# Altium PCB PoHalf.PcbDoc (part 1 of 2)
Units mil, origin at the board's own origin, x right, y up, seen from the top; angles counter-clockwise.
Board outline 6500 x 4500 mil, 2 copper layers (Top Layer, Bottom Layer), stack 33.512 mil thick; 134 components, 97 nets, 504 pads, 130 vias.
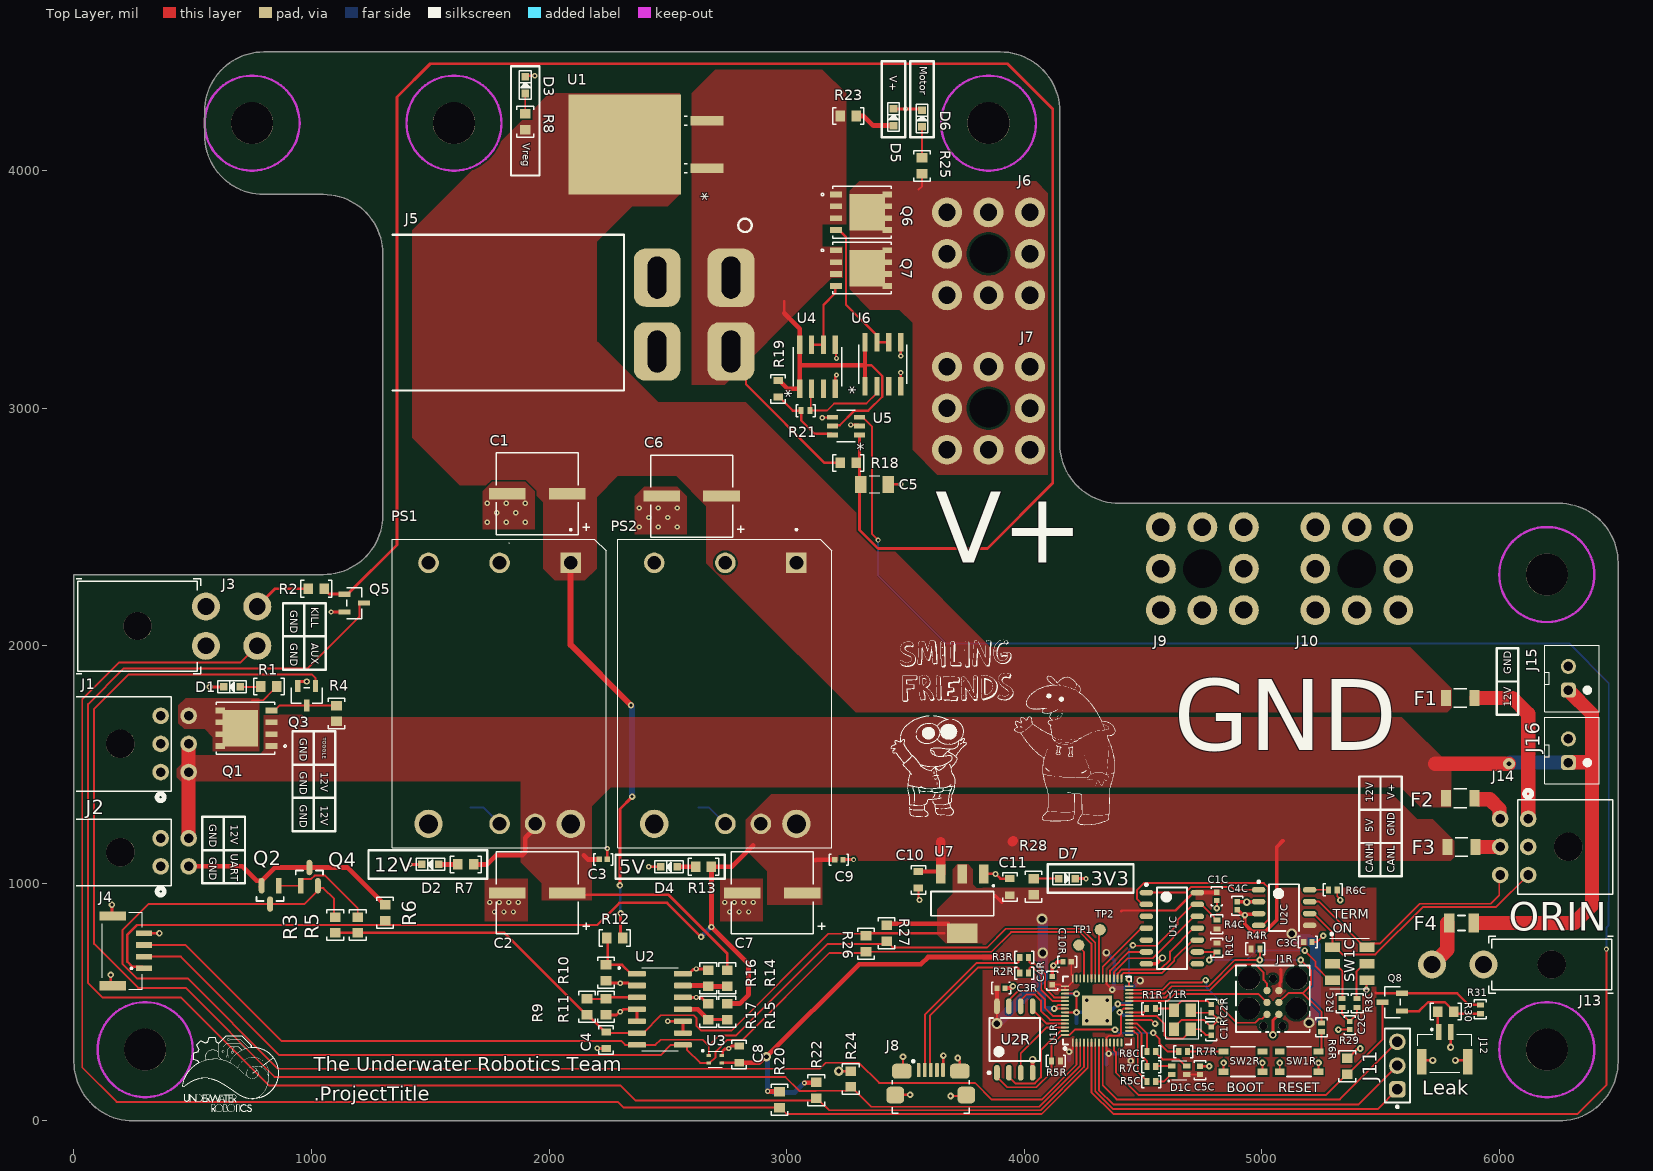
[diagram p0: Top Layer view]
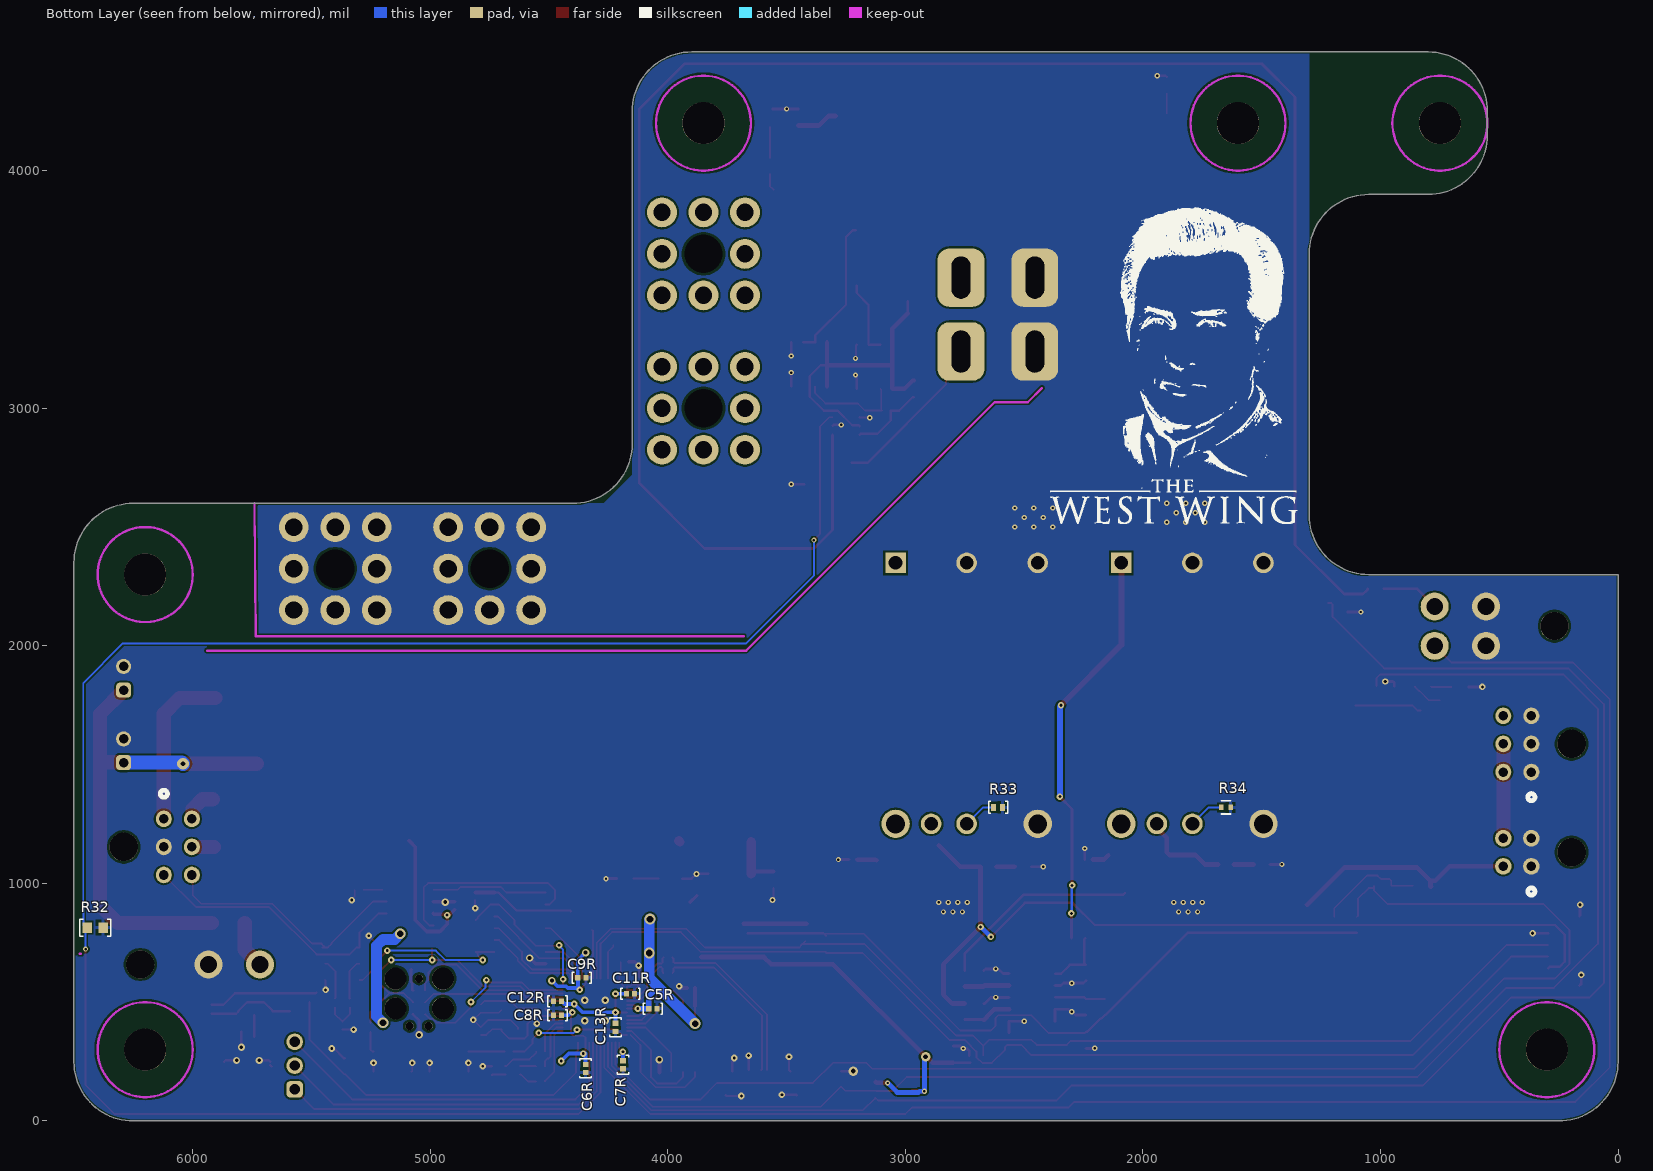
[diagram p1: Bottom Layer view, seen from below]
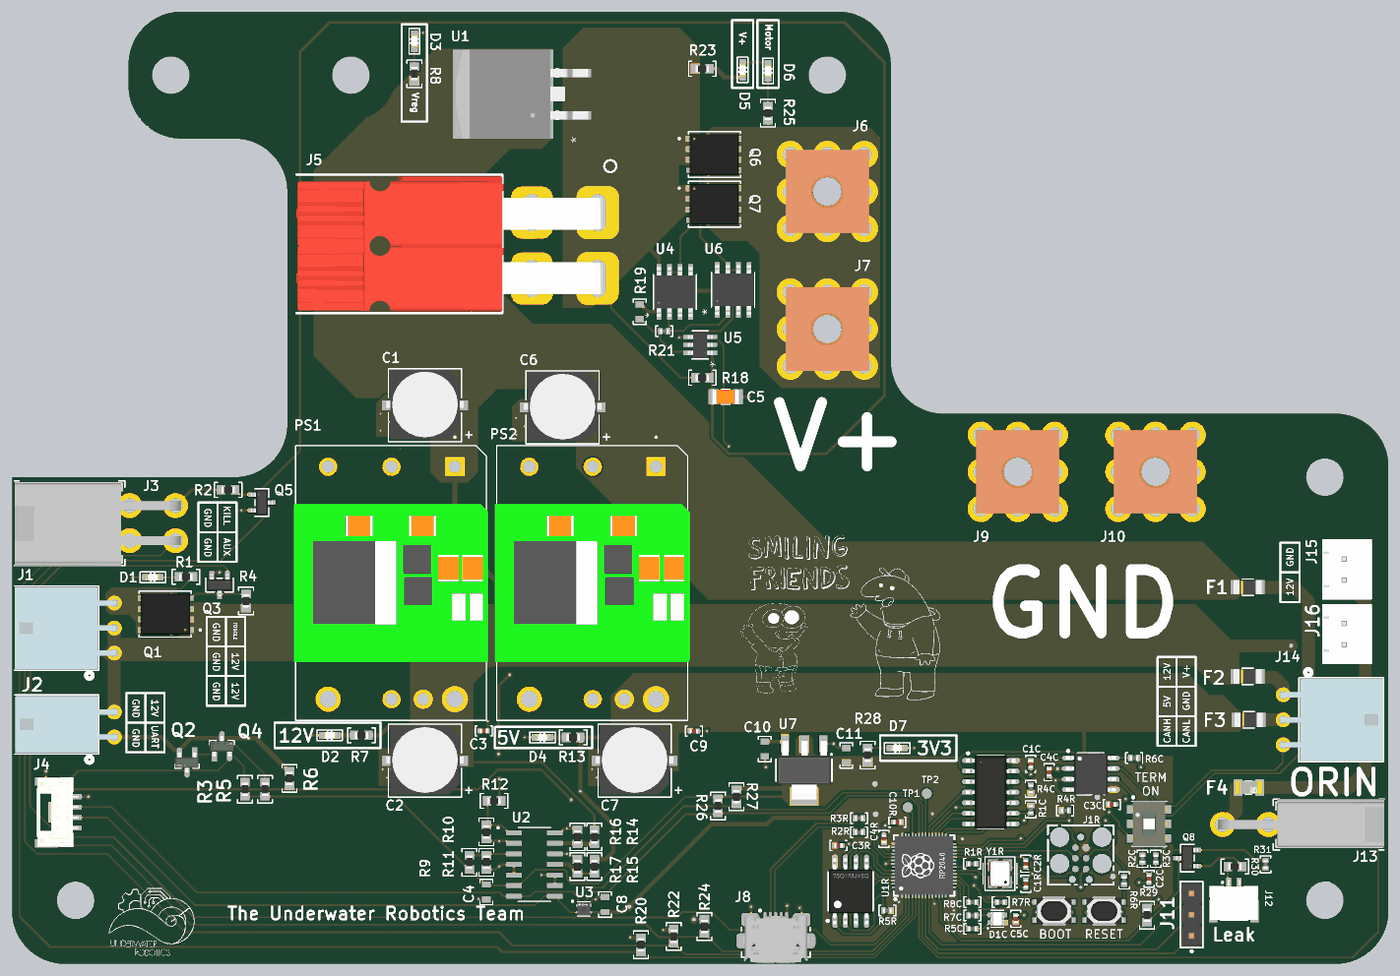
[diagram p3: 3D render of the assembled board from above, using the file's embedded part models]
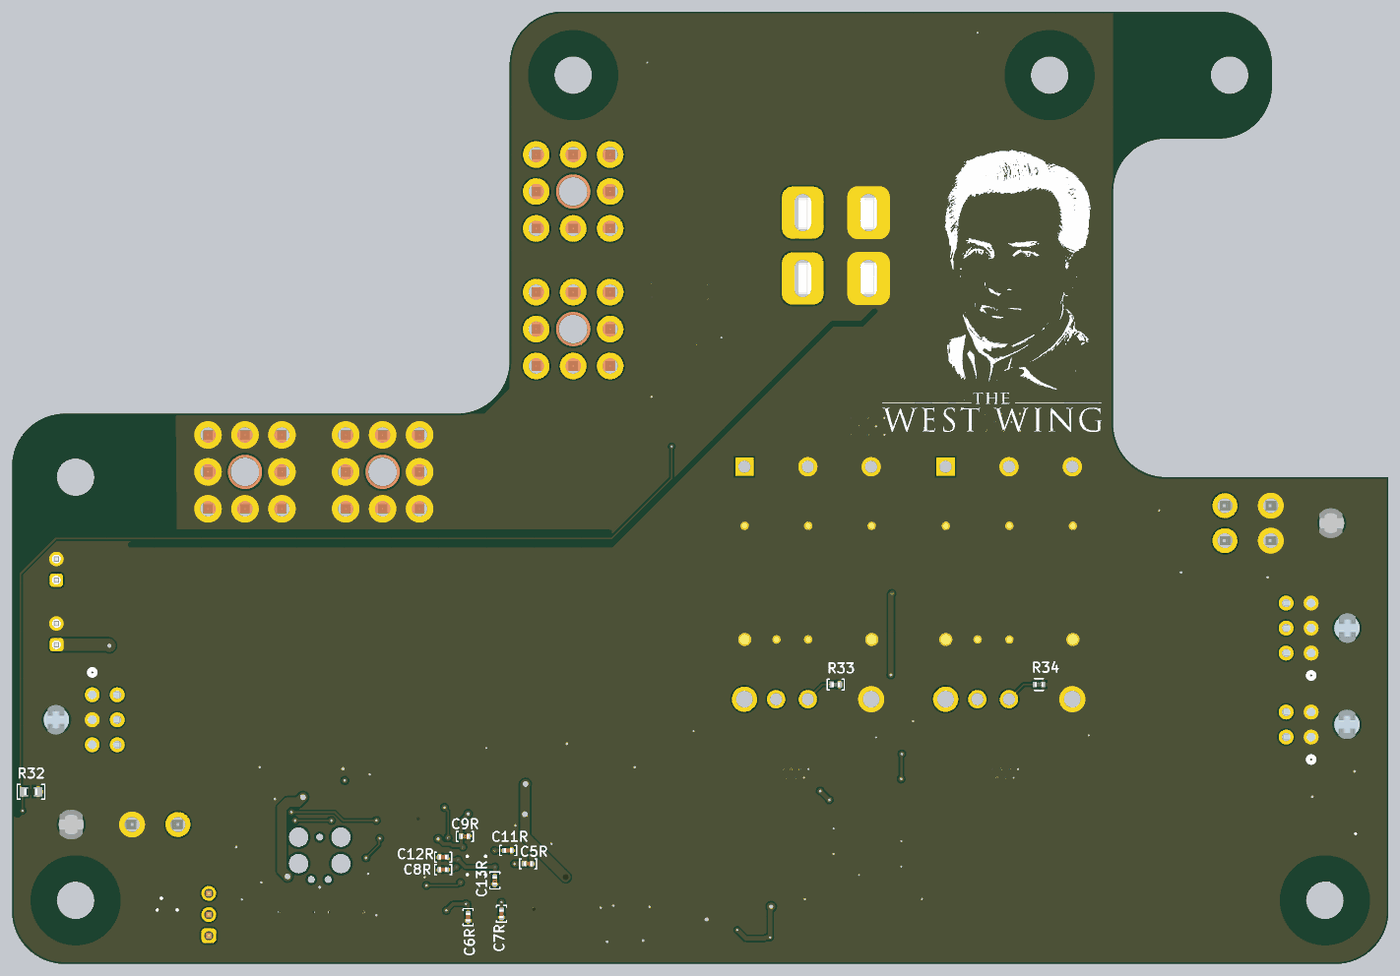
[diagram p4: 3D render of the assembled board from below, using the file's embedded part models]

## Layer stack, top to bottom
Top Solder: solder mask 1, SM-001, Dk 4
Top Layer: signal copper 2.7559
Dielectric 3: core 28, Core-039, Dk 4.8
Bottom Layer: signal copper 2.7559
Bottom Solder: solder mask 1, SM-001, Dk 4

## Board outline
800,3900 cw(c800,4150) 550,4150 550,4250 cw(c800,4250) 800,4500 3900,4500 cw(c3900,4250) 4150,4250 4150,2850 ccw(c4400,2850) 4400,2600 6250,2600 cw(c6250,2350) 6500,2350 6500,250 cw(c6250,250) 6250,0 250,0 cw(c250,250) 0,250 0,2300 1050,2300 ccw(c1050,2550) 1300,2550 1300,3650 ccw(c1050,3650) 1050,3900

## Design rules (kind name [scope] priority, off if disabled: settings)
AcuteAngle [All] p1: minimum=6.00000000000000E+0001 checktracksonly=FALSE
BoardOutlineClearance "BoardOutlineClearance JLCPCB" [All] p1: gap=7.87 ignorepadtopadclearanceinfootprint=FALSE
Clearance "Clearance JLCPCB 4 layer" [All] p1: gap=7.87 ignorepadtopadclearanceinfootprint=FALSE except(5: SMDPad-SMDPad; 6.3: Arc-Arc Arc-Track Arc-SMDPad Track-Track Track-SMDPad; 10: Arc-Hole Track-Hole SMDPad-Hole THPad-Hole Via-Hole Fill-Hole Poly-Hole Region-Hole Text-Hole)
DiffPairsRouting [All] p1: maxlimit=10 minlimit=6 mostfreqgap=8 toplayer_minwidth=3.54 toplayer_maxwidth=15 toplayer_prefwidth=8 bottomlayer_minwidth=3.54 bottomlayer_maxwidth=15 bottomlayer_prefwidth=8 maxuncoupledlength=500
HoleSize "HoleSize JLCPCB Pad" [IsPad] p1: absolutevalues=TRUE maxlimit=248.03 minlimit=19.68 maxpercent=80.000 minpercent=20.000
HoleSize "HoleSize JLCPCB 4 layer" [All] p2: absolutevalues=TRUE maxlimit=248.03 minlimit=7.87 maxpercent=80.000 minpercent=20.000
HoleToHoleClearance "HoleToHoleClearance JLCPCB" [All] p1: gap=10 allowstackedmicrovias=TRUE
MinimumAnnularRing "MinimumAnnularRing JLCPCB Pad" [IsPad] p1: minimumring=11.81
MinimumAnnularRing "MinimumAnnularRing JLCPCB 1oz" [All] p2: minimumring=5.12
MinimumSolderMaskSliver [All] p1: minsoldermaskwidth=1
PlaneConnect [All] p1: pad.planeconnectstyle=Relief pad.reliefexpansion=20 pad.reliefentries=4 pad.reliefconductorwidth=10 pad.reliefairgap=10 via.planeconnectstyle=Direct via.reliefexpansion=20 via.reliefentries=4 via.reliefconductorwidth=10 via.reliefairgap=10
PolygonConnect "GND Thermal Relief" [InNet('GND') AND OnLayer('Bottom Layer')] p1: thpad.connectstyle=Direct thpad.reliefconductorwidth=15 thpad.reliefentries=4 thpad.polygonreliefangle="45 Angle" thpad.airgapwidth=10 smdpad.connectstyle=Relief smdpad.reliefconductorwidth=15 smdpad.reliefentries=4 smdpad.polygonreliefangle="90 Angle" smdpad.airgapwidth=10 via.connectstyle=Direct via.reliefconductorwidth=15 via.reliefentries=4 via.polygonreliefangle="45 Angle" via.airgapwidth=10
PolygonConnect PolygonConnect_1 [All] p2: connectstyle=Direct reliefconductorwidth=10 reliefentries=4 polygonreliefangle="90 Angle" airgapwidth=10
RoutingVias "RoutingVias JLCPCB 4 layer" [All] p1: holewidth=19.68 width=39.37 viastyle="Through Hole" minholewidth=7.87 minwidth=15.75 maxholewidth=50 maxwidth=80
SilkToSilkClearance [All] p1: silktosilkclearance=3
SilkToSolderMaskClearance "SilkToSolderMaskClearance JLCPCB" [IsPad] p1: minsilkscreentomaskgap=5.91 clearancetoexposedcopper=TRUE
SolderMaskExpansion "SolderMaskExpansion JLCPCB" [All] p1: expansion=1.97 istentingtop=FALSE
SupplyNets "Schematic Supply Nets_10" [InNet('Vreg')] p1: voltage=0.000
SupplyNets "Schematic Supply Nets_9" [InNet('12V')] p2: voltage=0.000
SupplyNets "Schematic Supply Nets_8" [InNet('MOTOR_PWR')] p3: voltage=0.000
SupplyNets "Schematic Supply Nets_7" [InNet('V+')] p4: voltage=0.000
SupplyNets "Schematic Supply Nets_1" [InNet('3V3_RP2CAN')] p5: voltage=0.000
SupplyNets "Schematic Supply Nets_4" [InNet('GND')] p6: voltage=0.000
SupplyNets "Schematic Supply Nets_3" [InNet('5V')] p7: voltage=0.000
Width "Width JLCPCB 4 layer" [All] p1: maxlimit=196.85 minlimit=3.54 preferedwidth=9.84 minimp=50.000000 maximp=50.000000 favimp=50.000000
23 further rules are at their usual default settings.

## Classes and differential pairs
component class U_PD_MK2_Power: C1 C2 C3 C6 C7 C9 C10 C11 PS1 PS2 R33 R34 R48 R49 U1 U7
component class U_PD_MK2_Killswitch: C5 Q5 Q6 Q7 R2 R18 R19 R21 R22 R32 R45 R47 U4 U5 U6
component class U_PD_MK2_Circuits: C4 C8 J11 R9 R10 R11 R12 R14 R15 R16 R17 R20 R26 R27 R45 TP1 TP2 U2 U3
component class Connector: D1 D2 D3 D4 D5 D6 D7 F1 F2 F3 F4 J1 J2 J3 J4 J5 J6 J7 J8 J9 J10 J12 J13 J14 J15 J16 J17 Q1 Q2 Q3 Q4 Q8 R1 R3 R4 R5 R6 R7 R8 R13 R23 R24 R25 R28 R29 R30 R31 R44 R45
differential pair class "USB 2.0": USB USB_RP2040
component class U_RP2040_with_CAN: C1C C2C C3C C4C C5C C15 C18 C19 C20 C21 D1C R1C R2C R3C R4C R5C R6C R7C R8C R37 R41 R42 R43 SW1C SW3 U1C U2C U10 U11
component class U_RP2040_C: C1R C2R C3R C4R C5R C6R C7R C8R C9R C10R C11R C12 C12R C13 C13R C14 C16 C17 C22 C23 C24 C25 C26 C27 C28 C29 J1R R1R R2R R3R R4R R5R R6R R7R R36 R48 R49 SW1R SW2 SW2R U1R U2R U8 U9 Y1 Y1R
differential pair USB: +USB_P -USB_N
differential pair USB_RP2040: +USB_RP2040_P -USB_RP2040_N

## Components (designator, comment, footprint, x,y, rotation, side; value= is the part's Value field where it differs from the comment)
C1 "100uF electrolytic 35 V" PCAP_8x5.4-ELECT_NCA 1950,2640 r180 top value=100uF
C1C "100nF Ceramic 25V" CAPACITOR_0402 4810.86,945.25 r270 top value=0.1uF
C1R "27pF Ceramic 50V" CAPACITOR_0402 4787.24,378.32 r90 top value=27pF
C2 "22uF electrolytic 35 V" PCAP_8x5.4-ELECT_NCA 1950,960 r180 top value=22uF
C2C "4700pF Ceramic 25V" CAPACITOR_0402 5369.92,401.95 r90 top value=4.7nF
C2R "27pF Ceramic 50V" CAPACITOR_0402 4787.24,472.81 r270 top value=27pF
C3 "CL05A104KA5NNNC" CAPACITOR_0402 2228.01,1101 r0 top
C3C "100nF Ceramic 25V" CAPACITOR_0402 5193.89,753.13 r0 top value=0.1uF
C3R "100nF Ceramic 6.3V" CAPACITOR_0402 3902.59,559.43 r0 top value=0.1uF
C4 "100nF Ceramic 6.3V" CAPACITOR_0603 2240,340 r270 top value=0.1uF
C4C "100nF Ceramic 25V" CAPACITOR_0402 4897.48,905.88 r90 top value=0.1uF
C4R "1uF Ceramic 16V" CAPACITOR_0402 4117.95,590.92 r90 top value=1uF
C5 "10uF Ceramic 25V" CAPACITOR_1206 3370,2680 r0 top
C5C "1uF Ceramic 16V" CAPACITOR_0402 4739.99,212.97 r90 top value=1uF
C5R "100nF Ceramic 6.3V" CAPACITOR_0402 4062.83,472.81 r180 bottom value=0.1uF
C6 "100uF electrolytic 35 V" PCAP_8x5.4-ELECT_NCA 2600,2630 r180 top value=100uF
C6R "100nF Ceramic 6.3V" CAPACITOR_0402 4346.29,220.84 r270 bottom value=0.1uF
C7 "22uF electrolytic 35 V" PCAP_8x5.4-ELECT_NCA 2940,960 r180 top value=22uF
C7R "100nF Ceramic 6.3V" CAPACITOR_0402 4188.81,236.59 r270 bottom value=0.1uF
C8 "100nF Ceramic 6.3V" CAPACITOR_0603 2800,280 r90 top value=0.1uF
C8R "100nF Ceramic 6.3V" CAPACITOR_0402 4464.4,445.15 r0 bottom value=0.1uF
C9 "CL05A104KA5NNNC" CAPACITOR_0402 3220,1100 r0 top
C9R "100nF Ceramic 6.3V" CAPACITOR_0402 4362.04,602.73 r180 bottom value=0.1uF
C10 "10uF Ceramic 6.3V" CAPACITOR_0603 3555,1015 r270 top
C10R "100nF Ceramic 6.3V" CAPACITOR_0402 4180.94,669.66 r180 top value=0.1uF
C11 "10uF Ceramic 6.3V" CAPACITOR_0603 3940,985 r90 top
C11R "1uF Ceramic 16V" CAPACITOR_0402 4157.32,535.8 r180 bottom value=1uF
C12R "100nF Ceramic 6.3V" CAPACITOR_0402 4464.4,504.31 r0 bottom value=0.1uF
C13R "100nF Ceramic 6.3V" CAPACITOR_0402 4220.31,394.07 r270 bottom value=0.1uF
D1 "IN-S63AT5G" LED_0603 665,1827 r180 top
D1C "EAST1616RGBB4" LED_0606_4SMD 4653.38,212.97 r0 top
D2 "IN-S63AT5G" LED_0603 1500,1080 r180 top
D3 "IN-S63AT5G" LED_0603 1900,4360 r90 top
D4 "IN-S63AT5G" LED_0603 2505,1070 r180 top
D5 "IN-S63AT5G" LED_0603 3450,4225 r90 top
D6 "150060BS75000" LED_0603 3570,4220 r90 top
D7 "IN-S63AT5G" LED_0603 4180,1020 r0 top
F1 "0685H9150-01" 0501Series_LTF 5835.66,1780 r0 top
F2 "0685H9150-01" 0501Series_LTF 5835.66,1358.44 r0 top
F3 "0685H9150-01" 0501Series_LTF 5840.66,1153.44 r0 top
F4 "3413.0330.22" FP-3413_0330_22-MFG 5840.66,833.44 r0 top value=3.5mΩ
J1 "Microfit+ R/A" CONN_MOLEX_MICROFIT_6_POS_R/A 365,1586.89 r270 top
J1R "TagConnect SWD" TC2030-MCP 5047.08,598.8 r270 top
J2 "Microfit+ R/A" CONN_MOLEX_MICROFIT_4_POS_R/A 365,1071.89 r270 top
J3 "Mini-Fit Jr R/A" "CONN_MOLEX_MINIFIT JR_4 POS_R/A" 268,2082.68 r270 top
J4 "JST GH VERT" CONN_JST_BM04B-GHS-TBT(LF)(SN)(N) 163.11,716.18 r270 top
J5 "PP45 R/A" "CONN_ANDERSON_PP45_4 POS_R/A" 2455,3550 r270 top
J6 "Redcube M4 Term 85A" "Redcube M4 Term 85A" 3850,3650 r0 top
J7 "Redcube M4 Term 85A" "Redcube M4 Term 85A" 3850,3000 r0 top
J8 "USB_MICRO R/A" CONN_MINIUSB 3607.04,108.93 r0 top
J9 "Redcube M4 Term 85A" "Redcube M4 Term 85A" 4750,2325 r0 top
J10 "Redcube M4 Term 85A" "Redcube M4 Term 85A" 5400,2325 r0 top
J11 "61300311121" 61300311121 5571,233 r90 top
J12 "JST GH VERT" CONN_JST_SM02B-GHS-TB(LF)(SN) 5745.79,375 r0 top
J13 "Mini-Fit Jr R/A" "CONN_MOLEX_MINIFIT JR_2 POS_R/A" 6220.66,658.44 r90 top
J14 "Microfit+ R/A" CONN_MOLEX_MICROFIT_6_POS_R/A 6121.36,1153.44 r90 top
J15 "XH2.54 VERT" CONN_JST_XH254_2POS_VERT 6290.66,1813.44 r90 top
J16 "XH2.54 VERT" CONN_JST_XH254_2POS_VERT 6290.66,1508.44 r90 top
PS1 "I6A4W020A033V-001-R" CONV_I6A4W020A033V-001-R 1790,1800 r270 top
PS2 "I6A4W020A033V-001-R" CONV_I6A4W020A033V-001-R 2740,1800 r270 top
Q1 "SIR167DP-T1-GE3" MOSFET_7DP-T1-GE3_VIS 724.5,1653 r180 top
Q2 "MMBT3904-7-F" FP-SOT23-IPC_A 826.02,951.55 r270 top
Q3 "AO3404A" SOT-23-3 980,1790 r180 top
Q4 "MMBT3904-7-F" FP-SOT23-IPC_A 991.02,1028.45 r90 top
Q5 "MOSFET N-CH 30V 5.8A SOT-23-3" SOT-23-3 1180,2180 r270 top
Q6 "SIR167DP-T1-GE3" MOSFET_7DP-T1-GE3_VIS 3315.5,3825 r0 top
Q7 "SIR167DP-T1-GE3" MOSFET_7DP-T1-GE3_VIS 3315.5,3590 r0 top
Q8 "PNP 60V 600mA SOT23" SOT-23-3 5550,500 r90 top
R1 "4.7k Ohm 5% 1/10W" RESISTOR_0603 821,1829 r0 top
R1C "10k Ohm 1% 1/16W" RESISTOR_0402 4810.86,730.1 r270 top
R1R "1k Ohm 1% 1/16W" RESISTOR_0402 4534.21,472.81 r0 top
R2 "1k Ohm 5% 1/8W" RESISTOR_0603 1020,2240 r180 top
R2C "60.4 Ohm 1% 1/16W" RESISTOR_0402 5338.42,496.43 r270 top
R2R "27 Ohm 1% 1/16W" RESISTOR_0402 3999.84,622.42 r0 top
R3 "1k Ohm 5% 1/8W" RESISTOR_0603 1100,825 r90 top
R3C "60.4 Ohm 1% 1/16W" RESISTOR_0402 5401.41,496.43 r270 top
R3R "27 Ohm 1% 1/16W" RESISTOR_0402 3999.84,688.43 r0 top
R4 "10k Ohm 5% 1/10W" RESISTOR_0603 1105,1715 r90 top
R4C "10k Ohm 1% 1/16W" RESISTOR_0402 4810.86,827.14 r90 top
R4R "10k Ohm 1% 1/16W" RESISTOR_0402 4973.26,724.78 r0 top
R5 "1k Ohm 5% 1/8W" RESISTOR_0603 1195,825 r90 top
R5C "604 Ohm 1% 1/16W" RESISTOR_0402 4535.27,165.73 r0 top
R5R "10k Ohm 1% 1/16W" RESISTOR_0402 4133.7,252.34 r180 top
R6 "1k Ohm 5% 1/8W" RESISTOR_0603 1310,876.5 r90 top
R6C "10k Ohm 1% 1/16W" RESISTOR_0402 5299.05,973.01 r0 top
R6R "1k Ohm 1% 1/16W" RESISTOR_0402 5251.81,394.07 r90 top
R7 "3.9k Ohm 5% 1/10W" RESISTOR_0603 1650,1080 r180 top
R7C "200 Ohm 1% 1/16W" RESISTOR_0402 4535.27,228.72 r0 top
R7R "1k Ohm 1% 1/16W" RESISTOR_0402 4669.13,291.71 r180 top
R8 "3.9k Ohm 5% 1/10W" RESISTOR_0603 1900,4206.5 r90 top
R8C "200 Ohm 1% 1/16W" RESISTOR_0402 4535.27,291.71 r0 top
R9 "10k Ohm 0.5% 1/10W" RESISTOR_0603 2160,480 r90 top
R10 "1k Ohm 5% 1/10W" RESISTOR_0603 2240,623.5 r270 top
R11 "10k Ohm 0.5% 1/10W" RESISTOR_0603 2240,480 r270 top
R12 "10k Ohm 0.5% 1/10W" RESISTOR_0603 2276,770 r180 top
R13 "1k Ohm 5% 1/8W" RESISTOR_0603 2650,1070 r180 top
R14 "1k Ohm 5% 1/10W" RESISTOR_0603 2670,600 r90 top
R15 "1k Ohm 5% 1/10W" RESISTOR_0603 2670,460 r90 top
R16 "10k Ohm 0.5% 1/10W" RESISTOR_0603 2750,600 r270 top
R17 "10k Ohm 0.5% 1/10W" RESISTOR_0603 2750,460 r270 top
R18 "100k Ohm 0.5% 1/10W" RESISTOR_0603 3260,2770 r0 top
R19 "47K" CAPACITOR_0603 2964,3082 r90 top
R20 "1k Ohm 5% 1/8W" RESISTOR_0603 2970,90 r270 top
R21 "1k Ohm 1% 1/16W" RESISTOR_0402 3080,2990 r180 top
R22 "100k Ohm 0.5% 1/10W" RESISTOR_0603 3125,130 r270 top
R23 "3.9k Ohm 5% 1/10W" RESISTOR_0603 3260,4230 r0 top
R24 "10k Ohm 5% 1/10W" RESISTOR_0603 3270,176.5 r90 top
R25 "3.9k Ohm 5% 1/10W" RESISTOR_0603 3570,4020 r90 top
R26 "4.7k Ohm 5% 1/10W" RESISTOR_0603 3334,746 r270 top
R27 "4.7k Ohm 5% 1/10W" RESISTOR_0603 3421,790 r270 top
R28 "4.7k Ohm 5% 1/10W" RESISTOR_0603 4040,986.5 r270 top
R29 "1k Ohm 5% 1/8W" RESISTOR_0603 5360,230 r90 top
R30 "1k Ohm 5% 1/8W" RESISTOR_0603 5775,460 r180 top
R31 "20k Ohm 1% 1/16W" RESISTOR_0402 5920,470 r270 top
R32 "10k Ohm 5% 1/10W" RESISTOR_0603 6410.66,813.44 r0 bottom
R33 "RES 8.56K OHM 1% 1/16W 0402" RESISTOR_0402 2610,1320 r180 bottom
R34 "RT0402BRD071K82L" FP-RT0402-MFG 1650.32,1320 r0 bottom value=1.82KΩ
SW1C "Switch DPDT" CAS-220TA 5369.92,661.79 r270 top
SW1R "434123025826" SMD_434123025826 5157.32,249.39 r0 top
SW2R "434123025826" SMD_434123025826 4921.1,249.39 r0 top
TP1 "PCB Test Point" TESTPOINT_1.2MM 4230,740 r90 top
TP2 "PCB Test Point" TESTPOINT_1.2MM 4320,805 r90 top
U1 "MBRB2545CT" D2PAK_VIS 2318,4110 r90 top
U1C "MCP2517FD" SOIC-14 4621.88,811.39 r0 top
U1R "RP2040" "QFN-56 RP2040" 4306.92,464.94 r90 top
U2 "MCP3428-E/SL" SOIC127P600X175-14N 2466.65,470 r0 top
U2C "CAN Transceiver" SOIC-8 5094.33,898.01 r0 top
U2R "W25Q128JVSIQ" "SOIC-8 W25QxJV" 3960.47,342.83 r90 top
U3 "SHT14 SENSOR HUMID/TEMP" XDCR_SHT41-AD1B-R2 2700,260 r0 top
U4 "TC4432EOA713" SOIC8-N_MC_MCH 3130,3175 r90 top
U5 "DG448DV-T1-E3" TSOP6_DG_VIS-M 3250,2925 r180 top
U6 "TC4432EOA713" SOIC8-N_MC_MCH 3405,3185 r90 top
U7 "LM1117IMPX-3.3/NOPB" SOT-223-4 3740,915 r270 top
Y1R "CRYSTAL 12.0000MHZ 18PF SMD" "4-SMD, NO LEAD CRYSTAL 3.2x2.5mm" 4700.62,386.2 r90 top

## Footprints (in the part's own frame and the unit in brackets; to place one, negate y for a bottom-side part, rotate by r counter-clockwise, add the part's x,y. Pads: shape width x height; smd on the part's side, far side on the other; paste and mask are expansions set on the pad)
"4-SMD, NO LEAD CRYSTAL 3.2x2.5mm" [mm]
  rrect0% 1.4x1.1 smd: 1(0,0) 2(2.032,0) 3(2.032,1.778) 4(0,1.778)
  silkscreen extent -1.02,-1.2 3.05,2.92, body extent -0.58,-0.36 2.62,2.14, height 0.82
0501Series_LTF [mil]
  rect 42x68 smd paste+0 mask+0: 1(-59.5,0) 2(59.5,0)
  silkscreen extent -26,-39 26,39, body extent -66,-34 66,34, height 23
61300311121 [mil] "Pin Header, pitch 2.54 mm, THT, Vertical, single row, 3p"
  rrect50% 70x70 hole 43.31: 1(-100,0)
  round 70 hole 43.31: 2(0,0) 3(100,0)
  silkscreen extent -179,-53 156,53, body extent -150,-50 150,50, height 337
CAPACITOR_0402 [mm]
  rect 0.56x0.6 smd: 1(-0.435,0) 2(0.435,0)
  silkscreen extent -1.02,-0.6 1.02,0.6, body extent -0.5,-0.28 0.5,0.27, height 0.51
CAPACITOR_0603 [mil] "CAPACITOR 0603"
  rect 30x40 smd: 1(-35,0) 2(35,0)
  silkscreen extent -60,-30 60,30, body extent -31,-16 32,16, height 31
CAPACITOR_1206 [mm]
  rect 1.2x1.82 smd: 1(-1.46,0) 2(1.46,0)
  silkscreen extent -0.54,-0.9 0.54,0.9, body extent -1.6,-0.9 1.6,0.9, height 1.61
CAS-220TA [mm] "SWITCH SLIDE DPDT 100MA 6V"
  rrect0% 1x1.6 smd: 1(-1.75,-1.85) 2(0,-1.85) 3(1.75,-1.85) 4(-1.75,1.85) 5(0,1.85) 6(1.75,1.85)
  silkscreen extent -3.3,-2.1 2.7,2.1, body extent -2.7,-2.1 2.7,2.1, height 2.51
"CONN_ANDERSON_PP45_4 POS_R/A" [mm] "Anderson Powerpole45 2x2 Red/Black"
  rrect50% 6.25x5 hole 2 slot 4.5 at 0 deg: 1(0,7.9) 2(7.9,7.9) 3(0,0) 4(7.9,0)
  silkscreen extent -6.31,-28.25 12.07,10.12, body extent -4.32,-28.26 11.84,8.45, height 16.17
CONN_JST_BM04B-GHS-TBT(LF)(SN)(N) [mm] "JST GH Pitch 4 Pos Vertical"
  rect 0.6x1.7 smd: 1(1.875,3.35) 2(0.625,3.35) 3(-0.625,3.35) 4(-1.875,3.35)
  rect 1x2.8 smd: S1(-3.725,0) S2(3.725,0)
  silkscreen extent -4.13,-1.1 4.13,3.15, body extent -4.13,-1.12 4.13,3.83, height 4.15
CONN_JST_SM02B-GHS-TB(LF)(SN) [mm] "JST GH Pitch 2 Pos R/A"
  rect 0.6x1.7 smd: 1(0,0) 2(1.25,0)
  rect 1x2.7 smd: S1(-1.85,-3.2) S2(3.1,-3.2)
  silkscreen extent -2.25,-4.3 3.5,0.35, body extent -2.25,-4.28 3.5,0.58, height 4.26
CONN_JST_XH254_2POS_VERT [mm] "JST XH 2.54mm Pitch 2 Pos Vertical"
  rrect50% 1.62x1.62 hole 1.02: 1(0,0)
  round 1.62 hole 1.02: 2(2.54,0)
  silkscreen extent -2.29,-3.3 4.83,2.54, body extent -2.34,-3.35 4.88,2.49, height 7.21
CONN_MINIUSB [mm] "USB2.0 Micro-B Receptacle SMD R/A"
  rrect50% 0.4x1.5 smd: 1(-1.3,2.675) 2(-0.65,2.675) 3(0,2.675) 4(0.65,2.675) 5(1.3,2.675)
  rrect50% 2.1x1.6 smd: 6(-3.1,2.55) 7(3.1,2.55)
  rrect50% 1.9x1.8 smd: 8(3.8,0) 9(-3.8,0)
  silkscreen extent -4.14,-1.96 4.11,3.75, body extent -3.96,-2.67 3.96,2.99, height 2.72
CONN_MOLEX_MICROFIT_4_POS_R/A [mil] "CONN HEADER R/A 4POS 3MM"
  round 70 hole 40 paste-99999 mask+0: 1(0,0) 2(-118.11,0) 3(0,118.11) 4(-118.11,118.11)
  round 120 / inner round 60 / far side round 120 hole 120 unplated paste-99999 mask-60: 5(-59.05,-169.29)
  silkscreen extent -199,-354 121,45, body extent -195,-351 75,131, height 325
CONN_MOLEX_MICROFIT_6_POS_R/A [mil] "CONN HEADER R/A 6POS 3MM"
  round 70 / inner round 70 / far side oval 70x66.93 hole 40 paste-99999 mask+0: 1(118.11,0) 2(0,0) 3(-118.11,0) 4(118.11,118.11) 5(0,118.11) 6(-118.11,118.11)
  round 120 / inner round 60 / far side round 120 hole 120 unplated paste-99999 mask-60: 7(0,-169.29)
  silkscreen extent -199,-354 239,45, body extent -194,-353 194,129, height 325
"CONN_MOLEX_MINIFIT JR_2 POS_R/A" [mm] "Molex Minifit Jr 5569 2 Pos R/A"
  round 3 hole 1.8: 1(0,7.3) 2(0,12.8)
  round 3 hole 3 unplated mask+0: ""(0,0)
  silkscreen extent -3.05,-6.58 3.05,6.73, body extent -2.7,-6.6 3.1,13.34, height 11.4
"CONN_MOLEX_MINIFIT JR_4 POS_R/A" [mm] "Molex Minifit Jr 5569 4 Pos R/A"
  round 3 hole 1.8: 1(2.1,7.3) 2(-2.1,7.3) 3(2.1,12.8) 4(-2.1,12.8)
  round 3 hole 3 unplated mask+0: ""(0,0)
  silkscreen extent -5.08,-6.53 5.08,6.73, body extent -4.8,-6.5 5.2,13.44, height 11.4
CONV_I6A4W020A033V-001-R [mm]
  rect 2.205x2.205 hole 1.47: 1(-13.95,7.65)
  round 2.205 hole 1.47: 2(-13.95,0.05) 3(-13.95,-7.55) 6(13.95,0.05) 7(13.95,3.85)
  round 3.03 hole 2.02: 4(13.95,-7.55) 8(13.95,7.65)
  silkscreen extent -17.6,-11.45 16.5,11.45, body extent -9.53,-11.68 9.53,11.68, height 9.65
D2PAK_VIS [mil]
  rect 41x138 smd paste+0 mask+0: 1(-100,-347) 3(100,-347)
  rect 422x474 smd paste+0 mask+0: 2(0,0)
  silkscreen extent -119,-264 120,-250, body extent -210,-402 210,223, height 190
FP-3413_0330_22-MFG [mm]
  rect 1.1x2 smd paste+0 mask+0: 1(-1.3,0) 2(1.3,0)
  silkscreen extent -0.38,-0.8 0.38,0.8, body extent -1.95,-1.1 1.95,1.1, height 0.25
FP-RT0402-MFG [mm]
  rect 0.5x0.6 smd paste+0 mask+0: 1(-0.5,0) 2(0.5,0)
  silkscreen extent -0.5,-0.71 0.5,0.7, body extent -0.5,-0.25 0.5,0.25, height 0.35
FP-SOT23-IPC_A [mm]
  rect 1.659x0.627 smd paste+0 mask+0: 1(-0.977,0.915)
  rrect100% 1.659x0.627 smd paste+0 mask+0: 2(-0.977,-0.915) 3(0.977,0)
  silkscreen extent 0.23,-1.45 0.65,1.45, body extent -2.31,-1.95 2.31,1.95, height 0.25
LED_0603 [mil] "LED 0603"
  rect 32x32 smd: 1(-35,0) 2(35,0)
  silkscreen extent -60,-25 60,25, body extent -31,-16 32,16, height 28
LED_0606_4SMD [mm]
  rrect0% 0.8x0.55 smd: 1(-0.8,-0.45) 2(-0.8,0.45) 3(0.8,0.45) 4(0.8,-0.45)
  silkscreen extent -1.22,-1.22 0.8,1.02, body extent -0.8,-0.8 0.8,0.8, height 0.35
MOSFET_7DP-T1-GE3_VIS [mil]
  rect 50x24 smd: 1(-107.5,75) 2(-107.5,25) 3(-107.5,-25) 4(-107.5,-75)
  rect 150x154 smd: D(24.5,0)
  rect 40x24 smd: D(107.5,75) D(107.5,-25) D(107.5,25) D(107.5,-75)
  Top Layer region: 1.75,77 1.75,77 1.75,77 1.75,77 1.75,77 1.75,77 1.75,77 1.75,77
  Top Layer region: 1.75,-77 1.75,-77 1.75,-77 1.75,-77 1.75,-77 1.75,-77 1.75,-77 1.75,-77
  silkscreen extent -170,-109 125,109, body extent -121,-101 121,101, height 41
PCAP_8x5.4-ELECT_NCA [mil]
  rect 154x47 smd paste+0 mask+0: 1(-126,0) 2(126,0)
  silkscreen extent -222,-173 173,173, body extent -183,-167 183,160, height 219
"QFN-56 RP2040" [mm] "QFN, 56-Leads, Body 7.00x7.00mm, Pitch 0.40mm, Thermal Pad 3.10x3.10mm, IPC Medium Density"
  oval 0.875x0.2 smd: 1(-3.437,2.6) 2(-3.437,2.2) 3(-3.437,1.8) 4(-3.437,1.4) 5(-3.437,1) 6(-3.437,0.6) 7(-3.437,0.2) 8(-3.437,-0.2) 9(-3.437,-0.6) 10(-3.437,-1) 11(-3.437,-1.4) 12(-3.437,-1.8) 13(-3.437,-2.2) 14(-3.437,-2.6) 29(3.437,-2.6) 30(3.437,-2.2) 31(3.437,-1.8) 32(3.437,-1.4) 33(3.437,-1) 34(3.437,-0.6) 35(3.437,-0.2) 36(3.437,0.2) 37(3.437,0.6) 38(3.437,1) 39(3.437,1.4) 40(3.437,1.8) 41(3.437,2.2) 42(3.437,2.6)
  oval 0.2x0.875 smd: 15(-2.6,-3.437) 16(-2.2,-3.437) 17(-1.8,-3.437) 18(-1.4,-3.437) 19(-1,-3.437) 20(-0.6,-3.437) 21(-0.2,-3.437) 22(0.2,-3.437) 23(0.6,-3.437) 24(1,-3.437) 25(1.4,-3.437) 26(1.8,-3.437) 27(2.2,-3.437) 28(2.6,-3.437) 43(2.6,3.437) 44(2.2,3.437) 45(1.8,3.437) 46(1.4,3.437) 47(1,3.437) 48(0.6,3.437) 49(0.2,3.437) 50(-0.2,3.437) 51(-0.6,3.437) 52(-1,3.437) 53(-1.4,3.437) 54(-1.8,3.437) 55(-2.2,3.437) 56(-2.6,3.437)
  rect 3.2x3.2 smd: 57(0,0)
  silkscreen extent -4.19,-3.65 3.65,3.65, body extent -3.52,-3.52 3.52,3.52, height 0.85
"Redcube M4 Term 85A" [mm]
  round 3.2 hole 1.85: 1(-4.435,-4.435) 1(-4.435,0) 1(-4.435,4.435) 1(0,-4.435) 1(0,4.435) 1(4.435,-4.435) 1(4.435,0) 1(4.435,4.435)
  round 3.2 hole 4.1 unplated: 8(0,0)
  body extent -5,-5 5,5, height 3
RESISTOR_0402 [mm] "Resistor 0402"
  rect 0.55x0.75 smd: 1(-0.475,0) 2(0.475,0)
  silkscreen extent -1.02,-0.64 1.02,0.64, body extent -0.5,-0.25 0.5,0.25, height 0.25
RESISTOR_0603 [mil] "Resistor 0603"
  rect 40x45 smd: 1(-33.5,0) 2(33.5,0)
  silkscreen extent -65,-35 65,35, body extent -31,-16 32,16, height 16
SMD_434123025826 [mm]
  rect 1.05x0.65 smd: A1(-2.075,1.075) A2(2.075,1.075) B1(-2.075,-1.075) B2(2.075,-1.075)
  silkscreen extent -1.3,-1.6 1.3,1.6, body extent -2.3,-1.6 2.3,1.6, height 2.5
SOIC8-N_MC_MCH [mil]
  rect 78x22 smd paste+0 mask+0: 1(-93,75) 2(-93,25) 3(-93,-25) 4(-93,-75) 5(93,-75) 6(93,-25) 7(93,25) 8(93,75)
  silkscreen extent -82,-102 82,102, body extent -118,-96 118,96, height 69
SOIC127P600X175-14N [mm]
  rrect25% 1.9x0.6 smd: 1(-2.455,3.81) 2(-2.455,2.54) 3(-2.455,1.27) 4(-2.455,0) 5(-2.455,-1.27) 6(-2.455,-2.54) 7(-2.455,-3.81) 8(2.455,-3.81) 9(2.455,-2.54) 10(2.455,-1.27) 11(2.455,0) 12(2.455,1.27) 13(2.455,2.54) 14(2.455,3.81)
  silkscreen extent -4.45,-4.43 1.95,4.51
SOIC-8 [mm] "SOIC, 8-Leads, Body 4.90x3.90mm, Pitch 1.27mm, IPC Medium Density"
  oval 1.45x0.6 smd: 1(-2.725,1.905) 2(-2.725,0.635) 3(-2.725,-0.635) 4(-2.725,-1.905) 5(2.725,-1.905) 6(2.725,-0.635) 7(2.725,0.635) 8(2.725,1.905)
  silkscreen extent -2.85,-2.5 1.6,2.88, body extent -3,-2.5 3,2.5, height 1.75
"SOIC-8 W25QxJV" [mm] "SOIC, 8-Leads, Body 5.28x5.28mm, Pitch 1.27mm, IPC Medium Density"
  oval 1.7x0.6 smd: 1(-3.55,1.905) 2(-3.55,0.635) 3(-3.55,-0.635) 4(-3.55,-1.905) 5(3.55,-1.905) 6(3.55,-0.635) 7(3.55,0.635) 8(3.55,1.905)
  silkscreen extent -3.67,-2.7 2.3,2.88, body extent -3.95,-2.62 3.95,2.62, height 1.95
SOIC-14 [mm] "SOIC, 14-Leads, Body 8.65x3.90mm, Pitch 1.27mm, IPC Medium Density"
  oval 1.45x0.6 smd: 1(-2.725,3.81) 2(-2.725,2.54) 3(-2.725,1.27) 4(-2.725,0) 5(-2.725,-1.27) 6(-2.725,-2.54) 7(-2.725,-3.81) 8(2.725,-3.81) 9(2.725,-2.54) 10(2.725,-1.27) 11(2.725,0) 12(2.725,1.27) 13(2.725,2.54) 14(2.725,3.81)
  silkscreen extent -2.85,-4.35 1.6,4.78, body extent -3,-4.4 3,4.4, height 1.7
SOT-23-3 [mil]
  rect 22x50 smd paste+0 mask+4: 1(-37.5,-41) 2(37.5,-41) 3(0,41)
  silkscreen extent -65,-33 65,33, body extent -60,-52 60,52, height 44
SOT-223-4 [mm]
  rect 2.05x1 smd paste+0 mask+0.102: 1(-3.175,2.3) 2(-3.175,0) 3(-3.175,-2.3)
  rect 2.05x3.25 smd paste+0 mask+0.102: 4(3.175,0)
  silkscreen extent -1.96,-3.35 1.3,3.35, body extent -3.5,-3.25 3.5,3.25, height 1.68
TC2030-MCP [mil]
  round 31 smd: 1(50,-25) 2(50,25) 3(100,-25) 4(100,25) 5(150,-25) 6(150,25)
  round 34 hole 35 unplated: A(0,0) B(200,40) C(200,-40)
  round 92 hole 93 unplated: D(0,-100) E(125,-100) F(0,100) G(125,100)
  silkscreen extent -55,-155 225,155
TESTPOINT_1.2MM [mm]
  round 1.2 smd: TP(0,0)
TSOP6_DG_VIS-M [mil]
  rect 47x20 smd paste+0 mask+0: 1(-57,37.4) 2(-57,0) 3(-57,-37.4) 4(57,-37.4) 5(57,0) 6(57,37.4)
  silkscreen extent -39,-66 39,66, body extent -59,-61 59,61, height 43
XDCR_SHT41-AD1B-R2 [mm] "Sensirion AG SHT14 Sensor Humidity/Temp"
  rect 0.5x0.3 smd: 1(-0.7,0.4) 2(-0.7,-0.4) 3(0.7,-0.4) 4(0.7,0.4)
  silkscreen extent -1.45,-0.87 0.75,1.01, body extent -0.75,-0.75 0.75,0.75, height 0.54

## Part data
C1 C6: library part "CAP ALUM 100UF 20% 35V SMD", "100 µF 35 V Aluminum Electrolytic Capacitors Radial, Can - SMD 1000 Hrs", Manufacturer_Part_Number=UCB1V0R1MCL1GS, Mfr_Name=Nichicon, Supplier Part Number 1=667-EEE-1VA101XP, Copyright="Copyright (C) 2022 Ultra Librarian. All rights reserved.", Made By="Tyson Nguyen", RefDes=RefDes, Supplier 1=Mouser, Type=DEV
C1C C3C C3R C4C C5R C6R C7R C8R C9R C10R C12R C13R: library part CAPACITOR_0.1uF_0402, "Cap 100nF 25V +/-10% / Ceramic 0402", Supplier Part Number 1=478-7868-1-ND, Tolerance="+/- 10%", Voltage=25V, Made By="Robert Pafford", Supplier 1=Digi-Key
C1R C2R: library part CAPACITOR_0.000027uF_0402, "Cap 27pF 50V +/-5% / Ceramic 0402", Supplier Part Number 1=445-5589-1-ND, Tolerance="+/- 5%", Voltage=50V, Made By="Robert Pafford", Supplier 1=Digi-Key
C2 C7: library part "CAP ALUM 22UF 20% 35V SMD", "22 µF 35 V Aluminum Electrolytic Capacitors Radial, Can - SMD 1000 Hrs", Supplier Part Number 1=PCE3952DKR-ND, Voltage=35V, Made By="Robert Pafford", Supplier 1=Digi-Key
C2C: library part CAPACITOR_0.0047uF_0402, "4700 pF +/-10% 25V Ceramic Capacitor X7R 0402", Supplier Part Number 1=478-6195-1-ND, Tolerance="+/- 10%", Voltage=25V, Made By="Robert Pafford", Supplier 1=Digi-Key
C3: library part "CAP CER 0.1UF 25V X5R 0402", "0.1 µF ±10% 25V Ceramic Capacitor X5R 0402 (1005 Metric)", Capacitance=0.1uF, Rated Voltage=25V, Supplier Part Number 1=1276-1043-1-ND, Tolerance="+/- 10%", ComponentLink1Description="Data Sheet", ComponentLink1URL=https://mm.digikey.com/Volume0/opasdata/d220001/medias/docus/503/CL05A104KA5NNNC.pdf, Name="Zach Ramsey", Supplier 1=Digikey
C4 C8: library part CAPACITOR_0.1uF_0603, "Cap 100nF 6.3V +/-10% / Ceramic 0603", Supplier Part Number 1=399-15351-1-ND, Tolerance="+/- 10%", Voltage=6.3V, ComponentLink1Description=Datsheet, ComponentLink1URL=https://www.mouser.com/datasheet/2/212/KEM_C1002_X7R_SMD-1102033.pdf, Made By="Flip B", Supplier 1=Digi-Key
C4R C5C C11R: library part CAPACITOR_1uF_0402, "Cap 1uF 16V +/-10% / Ceramic 0402", Supplier Part Number 1=478-0402YD105KAT4ADKR-ND, Tolerance="+/- 10%", Voltage=16V, Made By="Robert Pafford", Supplier 1=Digi-Key
C5: library part CAPACITOR_10uF_1206, "Cap 10uF 25V +/-10% / Ceramic 1206", Supplier Part Number 1=1276-1804-6-ND, Tolerance="+/- 10%", Value (uF)="10 uF", Voltage=25V, Made By="Robert Pafford", Supplier 1=Digi-Key
C9: library part "CAP CER 0.1UF 25V X5R 0402", "0.1 µF ±10% 25V Ceramic Capacitor X5R 0402 (1005 Metric)", Capacitance=0.1uF, Rated Voltage=25V, Tolerance="+/- 10%", ComponentLink1Description="Data Sheet", ComponentLink1URL=https://mm.digikey.com/Volume0/opasdata/d220001/medias/docus/503/CL05A104KA5NNNC.pdf, Name="Zach Ramsey", Supplier 1=Avnet, Supplier Part Number 1=CL05A104KA5NNNC
C10 C11: library part CAPACITOR_10uF_0603, "Cap 10uF 6.3V +/-20% / Ceramic 0603", Supplier Part Number 1=1276-1119-1-ND, Tolerance="+/- 20%", Value (uF)="10 uF", Voltage=6.3V, ComponentLink1Description=Digikey, ComponentLink1URL=https://www.digikey.com/en/products/detail/samsung-electro-mechanics/CL10A106MQ8NNNC/3886777, Made By="Flip B", Supplier 1=Digi-Key
D1 D2 D3 D4 D5 D7: library part LED_Green_0603_3V, "LED Green Vf= 3V If = 0.005A / IN-S63AT5G", Color=Green, Forward Current=5mA, Forward Voltage=3V, Package=0603, Supplier Part Number 1=1830-1062-1-ND, ComponentLink1Description=Datasheet, ComponentLink1URL=https://www.we-online.de/katalog/datasheet/150060GS75000.pdf, Made By="Robert Pafford", Supplier 1=Digi-Key
D1C: library part LED_RGB_4SMD, "LED RGB CLEAR 4SMD", Blue Forward Current=5mA, Blue Forward Voltage=2.8V, Color=RGB, Package=4-SMD, Red Forward Voltage=1.8V, Supplier Part Number 1=1080-1552-1-ND, ComponentLink1Description=Datasheet, ComponentLink1URL=https://everlightamericas.com/index.php?controller=attachment&id_attachment=3220, Green Forward Current=5mA, Green Forward Voltage=2.8V, Made By="Robert Pafford", Red Forward Current=5mA, Supplier 1=Digi-Key
D6: library part LED_Blue_0603, "LED Blue Vf= 3.2V If = 0.020A / 150060BS75000", Color=Blue, Forward Current=20mA, Forward Voltage=3.2V, Package=0603, Supplier Part Number 1=732-4966-1-ND, Made By="Robert Pafford", Supplier 1=Digi-Key
F1 F2 F3: library part "Bel Fuse 15A", "Bel Fuse", Breaking Capacity=150A, Current Rating=15, Package=1206, Voltage Rating=32V, Created By="Nathan Ayer", Manufacturer_Part_Number=0685H9150-01, Mfr_Name="Bel Fuse", Response Time="Fast Blow"
F4: library part CMP-26293-000001-1, "FUSE BOARD MNT 15A 32VAC 63VDC", Ambient Temperature Range High=+90°C, Ambient Temperature Range Low=-55°C, Fuse Current=15A, Fuse Interrupt Dc Current=100A, Fuse Voltage Drop=57mV, Manufacturer="Schurter Inc", Max Fuse Ac Voltage=32V, Max Fuse Dc Voltage=63V, Package=0, Resistance=3.5mΩ, Automotive=No, Category=Fuse, ComponentLink2Description=Datasheet, ComponentLink2URL=https://us.schurter.com/en/datasheet/typ_UST_1206.pdf, Device Class L1="Circuit Protection", Device Class L2=Fuses, Device Class L3=unset, Digikey Description="FUSE BOARD MNT 15A 32VAC 63VDC", Fuse Blow Speed=Slow, Fuse I2T=65A2Sec, Height=0.6mm, Ipc Land Pattern Name=CAPC320160X60, Lead Free=Yes, Manufacturer Part Number=3413.0330.22, Mouser Description="Surface Mount Fuses UST 1206 FUSE 15A F", Octopart=https://octopart.com/3413.0330.22-schurter-8400836, RoHS=TRUE, Voltage Rating=63V
J1 J14: library part CONN_MOLEX_MICROFIT+_6POS_R/A, "Molex Microfit+  / 212528 6 POS R/A Black", Color=Black, Current Per Pin=12.5, Manufacturer=Molex, Supplier Part Number 1=900-2125280600-ND, Configuration=R/A, Pitch=3.0mm, Supplier 1=Digikey
J1R: library part TC2030_SWD, "TagConnect TC2030 ARM SWD 6-pin"
J2: library part CONN_MOLEX_MICROFIT+_4POS_R/A, "Molex Microfit+  / 212528 4 POS R/A Black", Color=Black, Current Per Pin=12.5A, Manufacturer=Molex, Supplier Part Number 1=900-2125280400-ND, Configuration=R/A, Pitch=3.0mm, Supplier 1=Digikey
J3: library part "CONN_MOLEX_MINIFIT JR_4POS_R/A", "Molex Minifit Jr. 5569  / 4 Pos R/A Natural", Color=Natural, Current Per Pin=13A, Manufacturer=Molex, Supplier Part Number 1=WM13112-ND, ComponentLink1Description=Datasheet, ComponentLink1URL=https://www.molex.com/pdm_docs/sd/026013115_sd.pdf, Configuration="Right Angle", Created By="Flip B", Number of Positions=4, Pitch=4.2mm, Series="Minifit Jr 5569", Supplier 1=Digi-Key
J4: library part CONN_JST_GH_4POS_VERT, "JST GH Pitch 4 Pos Vertical", Color=Natural, Current Per Pin=1A, Manufacturer=JST, Supplier Part Number 1=455-1580-1-ND, Configuration=Vertical, Created By="Robert P", Number of Positions=4, Pitch=1.25mm, Series=GH, Supplier 1=Digi-Key
J5: library part CONN_ANDERSON_2x2_R/A, "Anderson PP45 / 4 Pos R/A Red/Black", Color=Red/Black, Current Per Pin=45A, Manufacturer=Anderson, Supplier Part Number 1=2243-1337G1-ND, ComponentLink1Description=Datasheet, ComponentLink1URL=https://www.andersonpower.com/content/dam/app/ecommerce/product-pdfs/DS-PP1545.pdf, Configuration="Right Angle", Created By="Flip B", Number of Positions=4, Pitch=7.9mm, Series="PowerPole 45", Supplier 1=Digi-Key, Supplier 2=Digi-Key, Supplier 3=Digi-Key, Supplier 4=Digi-Key, Supplier Part Number 2=2243-1336G1-ND, Supplier Part Number 3=2243-1327-BK-ND, Supplier Part Number 4=A102007-ND
J6 J7 J9 J10: Current Rating="85 A", Created By="Nahtan Ayer", Screw Size=M4
J8: library part CONN_MICROUSB, "Amphenol Micro USB-B / USB2.0 5 Pin Right Angle SMD", Color=Silver, Current Per Pin=1.8A, Manufacturer=Amphenol, Supplier Part Number 1=609-4613-1-ND, ComponentLink1Description=Datasheet, ComponentLink1URL=https://cdn.amphenol-icc.com/media/wysiwyg/files/documentation/datasheet/inputoutput/io_usb_micro.pdf?__cf_chl_jschl_tk__=05693735e19256298f6ef6ca2bb2e65c376a4f56-1625503833-0-Abitsb0-ufjOXJYs_S3J3r2iTn-nObalbmXUksF1VvO_h_WEmRdMlUD1I8-hmWSEVWzY1pirKnrPZWfgY3851qyBZe5ZvnNQePLGIzUgdEIQBVUyW36RsbYpDLEWxJ4horD-5gChFgobLYqwmG5aHl0E8lIn_twwPPrOxilK2gP0q9t_CNOs_u5fMqXvXUrlsOv8tIE2NRlu6NVP8qtkL2GjhlkeTUbDMF8WvvpPDTFOgvZ4Y16Ej8F8AhWos88mo5B1HssXozw0XrkJQIqERITUu6rqloz9kf4ZzhBHtDAt-IkiAFY_Ds9SW8FYKKTtINJVpHZQ6Gyu1FFM4Dc9MO0maE8_mmNcwlxqyRoRk_MPWW8VyByXWM5RSp52jteRKw7FeI9WIYvCbPAOy0Eyib-aseIQsnGbglBcUY6_2xp8GYaJM38H3dNvBPsSOfJBPndKedwKHllxjkucXn6xsN0sDXkpGN-cu8_2bDTJ0g-uUucKSCooYX-ApSDNGpkA_p9zv1SOAD8c0zaZVmtiBsN75QpVz2rzq9_BFxOywPvR, Configuration="Right Angle", Created By="Flip B", Number of Positions=5, Pitch=0.65mm, Series=10118192, Supplier 1=Digi-Key
J11: library part CMP-1502-01062-4, "THT Vertical Pin Header WR-PHD, Pitch 2.54 mm, Single Row, 3 pins", Color=Black, Contact Resistance=20mΩ, Current Rating=3A, Max Operating Temperature=105°C, Min Operating Temperature=-40°C, Operating Supply Voltage=250V, Connector Type="Male Pin", Contact Material=Gold, Contact Mating Length=5.9944mm, Contact Plating=Gold, Gender=Male, Height=8.94mm, Lead Free="Lead Free", Lead Pitch=2.54mm, Mount="Through Hole", Number of Contacts=3, Number of Pins=3, Number of Positions=3, Number of Rows=1, Orientation=Vertical, Packaging=Bulk, Pitch=2.54mm, RoHS=Compliant, Termination=Solder, Voltage Rating=250V
J12: library part CONN_JST_GH_2POS_VERT, "JST GH Pitch 2 Pos Vertical", Color=Natural, Current Per Pin=1A, Manufacturer=JST, Supplier Part Number 1=455-1564-1-ND, Configuration=Vertical, Created By="Robert P", Number of Positions=4, Pitch=1.25mm, Series=GH, Supplier 1=Digi-Key
J13: library part "CONN_MOLEX_MINIFIT JR_2POS_R/A", "Molex Minifit Jr. 5569  / 2 Pos R/A Natural", Color=Natural, Current Per Pin=13A, Manufacturer=Molex, Supplier Part Number 1=WM1351-ND, ComponentLink1Description=Datasheet, ComponentLink1URL=https://www.molex.com/pdm_docs/sd/026013115_sd.pdf, Configuration="Right Angle", Created By="Robert P", Number of Positions=2, Pitch=4.2mm, Series="Minifit Jr 5569", Supplier 1=Digi-Key
J15 J16: library part CONN_JST_XH254_2POS_VERT, "JST XH 2.54mm Pitch 2 Pos Vertical", Color=White, Current Per Pin=4A, Manufacturer=JST, ComponentLink1Description="Purchase Link", ComponentLink1URL=https://www.amazon.com/460PCS-XH2-54-Connector-Terminal-Connectors/dp/B09DBGVX5C, Configuration=Vertical, Created By="Robert P", NOTE="Do not use JST 2.5mm parts with this footprint. JST does not make 2.54mm pitch pins, rather only clones make this connector!", Number of Positions=2, Pitch=2.54mm, Series="XH 2.54"
PS1 PS2: "Non-Isolated PoL Module DC DC Converter 1 Output 3.3 ~ 15V 20A 9V - 53V Input", Package="DIP-8 TDK-Lambda", Availability="In Stock", Check_prices=https://www.snapeda.com/parts/I6A4W020A033V-001-R/TDK-Lambda%20Americas%20Inc./view-part/1737324/?ref=eda, MF="TDK-Lambda Americas", MP=I6A4W020A033V-001-R, Price=None, Purchase-URL=https://pricing.snapeda.com/search/part/I6A4W020A033V-001-R/?ref=eda, SnapEDA_Link=https://www.snapeda.com/parts/I6A4W020A033V-001-R/TDK-Lambda%20Americas%20Inc./view-part/1737324/?ref=snap
Q1 Q6 Q7: "P-Channel 30 V 60A (Tc) 65.8W (Tc) Surface Mount PowerPAK® SO-8", Mfr_Name=Vishay, Supplier Part Number 1=78-SIR167DP-T1-GE3, Copyright="Copyright (C) 2022 Ultra Librarian. All rights reserved.", Manufacturer_Part_Number=SIR167DP-T1-GE3, RefDes=RefDes, Supplier 1=Mouser, Type=DEV
Q2 Q4: library part CMP-2000-04931-2, "TRANS NPN 40V 0.2A SMD SOT23-3", Case/Package=SOT-23, Collector Base Voltage (VCBO)=60V, Collector Emitter Breakdown Voltage=40V, Collector Emitter Saturation Voltage=300mV, Continuous Collector Current=200mA, Emitter Base Voltage (VEBO)=6V, Frequency=300MHz, Max Operating Temperature=150°C, Max Power Dissipation=300mW, Min Operating Temperature=-55°C, Package Quantity=3000, Power Dissipation=350mW, Collector Emitter Voltage (VCEO)=40V, Contact Plating=Tin, Element Configuration=Single, Gain Bandwidth Product=300MHz, Height=1mm, hFE Min=100, Lead Free="Lead Free", Length=3.05mm, Max Breakdown Voltage=40V, Max Collector Current=200mA, Max Frequency=300MHz, Mount="Surface Mount", Number of Elements=1, Number of Pins=3, Packaging="Tape and Reel", Polarity=NPN, Radiation Hardening=No, REACH SVHC="No SVHC", Transition Frequency=300MHz, Voltage Rating (DC)=40V, Weight=0.000282oz, Width=1.4mm
Q3: "N-Channel 30 V 5.8A (Ta) 1.4W (Ta) Surface Mount SOT-23-3", Amp Rating="5.8 A", Package=SOT23-3L, Power Dissipation="1.4W (Ta)", Supplier Part Number 1=785-1004-1-ND, Created By="Dylan T", FET Type=N-Channel, Manufacturer _Part_Number=AO3404A, Rds (on)="28mOhm @ 5.8A, 10V", SourceLibrary=ON_Semiconductor_2020-01-13, Supplier 1=Digi-Key, Vdss=30V, Vendor="Alpha & Omega Semiconductor Inc.", Vgs (Max)="3V @ 5.8A, 10V", Vgs (th)="3V @ 250µA"
Q5: library part AO3404A, "N-Channel 30 V 5.8A (Ta) 1.4W (Ta) Surface Mount SOT-23-3", Amp Rating="5.8 A", Package=SOT23-3L, Power Dissipation="1.4W (Ta)", Supplier Part Number 1=785-1004-1-ND, Created By="Dylan T", FET Type=N-Channel, Manufacturer _Part_Number=AO3404A, Rds (on)="28mOhm @ 5.8A, 10V", SourceLibrary=ON_Semiconductor_2020-01-13, Supplier 1=Digi-Key, Vdss=30V, Vendor="Alpha & Omega Semiconductor Inc.", Vgs (Max)="3V @ 5.8A, 10V", Vgs (th)="3V @ 250µA"
Q8: library part MMBT2907A-7-F, "PNP 60 V 600mA Surface Mount SOT-23", Amp Rating=600mA, Package="TO-236-3, SC-59, SOT-23-3", Power Dissipation="1.56W (Tc)", Supplier Part Number 1=MMBT2907A-FDICT-ND, BJT Type=PNP, ComponentLink1Description=Datasheet, ComponentLink1URL=https://media.digikey.com/pdf/Data%20Sheets/Diodes%20PDFs/MMBT2907A_Rev2016.pdf, Created By="Robert Pafford", Manufacturer_Part_Number=MMBT2907A-7-F, Rds (on)="50mOhm @ 3A, 4.5V", Supplier 1=Digi-Key, Vdss="20 V", Vendor=Digikey, Vgs (Max)=±10V, Vgs (th)="800mV @ 250µA"
R1 R26 R27 R28: library part RESISTOR_4.7K_0603, "RES 4.7k OHM 5% 1/10W 0603", Digikey Part Numer=CR0603-JW-104ELFTR-ND, Supplier Part Number 1=RMCF0603JT4K70CT-ND, Tolerance="+/- 5%", Value  (Ohms)=4.7K, Made By="Robert Pafford", Supplier=Digikey, Supplier 1=Digi-Key, Wattage=1/10W
R1C R4C R4R R5R R6C: library part RESISTOR_10K_0402, "RES 10k OHM 1% 1/16W 0402", Digikey Part Numer=CR0603-JW-104ELFTR-ND, Supplier Part Number 1=YAG3436CT-ND, Tolerance="+/- 1%", Value  (Ohms)=10K, Made By="Robert Pafford", Supplier=Digikey, Supplier 1=Digi-Key, Wattage=1/16W
R1R R6R R7R R21: library part RESISTOR_1K_0402, "RES 1k OHM 1% 1/16W 0402", Digikey Part Numer=CR0603-JW-104ELFTR-ND, Supplier Part Number 1=13-AC0402FR-131KLCT-ND, Tolerance="+/- 1%", Value  (Ohms)=1K, Made By="Robert Pafford", Supplier=Digikey, Supplier 1=Digi-Key, Wattage=1/16W
R2 R3 R5 R6 R13 R20 R29 R30: library part RESISTOR_1K_0603, "RES 1k OHM 5% 1/8W 0603", Digikey Part Numer=CR0603-JW-104ELFTR-ND, Supplier Part Number 1=2019-RK73B1JTTD102JCT-ND, Tolerance="+/- 5%", Value  (Ohms)=1K, ComponentLink1Description=Datasheet, ComponentLink1URL=https://www.bourns.com/docs/product-datasheets/CRxxxxx.pdf, Made By="Robert Pafford", Supplier=Digikey, Supplier 1=Digi-Key, Wattage=1/8W
R2C R3C: library part RESISTOR_60.4_0402, "RES 60.4 OHM 1% 1/16W 0402", Digikey Part Numer=CR0603-JW-104ELFTR-ND, Supplier Part Number 1=13-AC0402FR-0760R4LCT-ND, Tolerance="+/- 1%", Value  (Ohms)=60.4, Made By="Robert Pafford", Supplier=Digikey, Supplier 1=Digi-Key, Wattage=1/16W
R2R R3R: library part RESISTOR_27_0402, "RES 27 OHM 1% 1/16W 0402", Digikey Part Numer=CR0603-JW-104ELFTR-ND, Supplier Part Number 1=YAG5278DKR-ND, Tolerance="+/- 1%", Value  (Ohms)=27, Made By="Robert Pafford", Supplier=Digikey, Supplier 1=Digi-Key, Wattage=1/16W
R4 R24 R32: library part RESISTOR_10K_0603, "RES 10k OHM 5% 1/10W 0603", Digikey Part Numer=CR0603-JW-104ELFTR-ND, Supplier Part Number 1=2019-RK73B1JTTD103JCT-ND, Tolerance="+/- 5%", Value  (Ohms)=10K, ComponentLink1Description=Datasheet, ComponentLink1URL=https://www.bourns.com/docs/product-datasheets/CRxxxxx.pdf, Made By="Robert Pafford", Supplier=Digikey, Supplier 1=Digi-Key, Wattage=1/8W
R5C: library part RESISTOR_604_0402, "RES 604 OHM 1% 1/16W 0402", Digikey Part Numer=CR0603-JW-104ELFTR-ND, Supplier Part Number 1=13-AC0402FR-07604RLCT-ND, Tolerance="+/- 1%", Value  (Ohms)=604, Made By="Robert Pafford", Supplier=Digikey, Supplier 1=Digi-Key, Wattage=1/16W
R7 R8 R23 R25: library part RESISTOR_3.9K_0603, "RES 3.9k OHM 1% 1/10W 0603", Supplier Part Number 1=P3.90KHCT-ND, Tolerance="+/- 1%", Value  (Ohms)=3.9K, Made By="Robert Pafford", Supplier 1=Digi-Key, Wattage=1/10W
R7C R8C: library part RESISTOR_200_0402, "RES 200 OHM 1% 1/16W 0402", Digikey Part Numer=CR0603-JW-104ELFTR-ND, Supplier Part Number 1=YAG3453CT-ND, Tolerance="+/- 1%", Value  (Ohms)=200, Made By="Robert Pafford", Supplier=Digikey, Supplier 1=Digi-Key, Wattage=1/16W
R9 R11 R12 R16 R17: library part RESISTOR_10K_0.5%_0603, "RES 10k OHM 0.5% 1/10W 0603", Digikey Part Numer=CR0603-JW-104ELFTR-ND, Supplier Part Number 1=749-1695-1-ND, Tolerance="+/- 0.5%", Value  (Ohms)=10K, Made By="Robert Pafford", Supplier=Digikey, Supplier 1=Digi-Key, Wattage=1/10W
R10 R14 R15: library part RESISTOR_1K_0.5%_0603, "RES 1k OHM 0.5% 1/10W 0603", Digikey Part Numer=CR0603-JW-104ELFTR-ND, Supplier Part Number 1=749-1693-1-ND, Tolerance="+/- 0.5%", Value  (Ohms)=1K, Made By="Robert Pafford", Supplier=Digikey, Supplier 1=Digi-Key, Wattage=1/10W
R18 R22: library part RESISTOR_100K_0.5%_0603, "RES 100k OHM 0.5% 1/10W 0603", Digikey Part Numer=CR0603-JW-104ELFTR-ND, Supplier Part Number 1=311-2395-1-ND, Tolerance="+/- 0.5%", Value  (Ohms)=100K, ComponentLink1Description=Datasheet, ComponentLink1URL=https://www.bourns.com/docs/product-datasheets/CRxxxxx.pdf, Made By="John Ulm", Supplier=Digikey, Supplier 1=Digi-Key, Wattage=1/10W
R19: library part RC0603JR-1347KL, "47kohm 0603 1/10w", Mfr_Name=Yageo, Supplier Part Number 1=667-ERJ-3GEYJ473V, Copyright="Copyright (C) 2024 Ultra Librarian. All rights reserved.", Manufacturer_Part_Number=RC0603JR-1347KL, RefDes=RefDes, Supplier 1=Mouser, Type=DEV
R31: library part RESISTOR_20K_0402, "RES 20k OHM 1% 1/16W 0402", Supplier Part Number 1=YAG3454CT-ND, Tolerance="+/- 1%", Value  (Ohms)=20K, Made By="Robert Pafford", Supplier 1=Digikey, Wattage=1/16W
R33: library part RESISTOR_8.56K_1%_0402, "8.56 kOhms ±1% 0.063W, 1/16W Chip Resistor 0402 (1005 Metric) Automotive AEC-Q200, Moisture Resistant Metal Film", Supplier Part Number 1=2019-RN73H1ETTP8561F50CT-ND, Tolerance="+/- 1%", Value (Ohms)=8.56K, Made By="John Ulm", Supplier 1=Digi-Key, Wattage=1/16W
R34: library part CMP-03412-030148-1, "RES SMD 1.82K OHM 0.1% 1/16W", Manufacturer=Yageo, Package=RT0402, Power Rating=0.063W, Resistance=1.82KΩ, Temperature="-55°C to +155°C", Temperature Coefficient="25 ppm/°C", Temperature Range High=+155°C, Temperature Range Low=-55°C, Tolerance=0.001, Voltage Rating=50V, Automotive=No, Category=Res, ComponentLink2Description=Datasheet, ComponentLink2URL=http://www.yageo.com/documents/recent/PYu-RT_1-to-0.01_RoHS_L_9.pdf, Composition="Thin Film", Device Class L1="Passive Components", Device Class L2=Resistors, Device Class L3="Chip SMD Resistors", Digikey Description="RES SMD 1.82K OHM 0.1% 1/16W", Footprint Url=http://www.yageo.com/exep/pages/download/literatures/PYu-R_Mount_10.pdf, Height=0.35mm, Ipc Land Pattern Name=RESC10050X30, Lead Free=Yes, Manufacturer Part Number=RT0402BRD071K82L, Mouser Description="Thin Film Resistors 1/16W 1.82K ohm .1% 25ppm", Octopart=https://octopart.com/rt0402brd071k82l-yageo-1433757, RoHS=TRUE, Series=RT
SW1C: library part CAS-220TA_CAN_TERM, "GOLD SWITCH FLUSH SLIDE DPDT 100MA 6V", Current Rating="100 mA", Supplier Part Number 1=CAS220JCT-ND, Voltage Rating=6VDC, Contact Finish=Gold, Made By="Robert Pafford", Supplier 1=Digi-Key, Switch Function=DPDT
SW1R SW2R: library part "Tactile Switch SMD", "WS-TASV J-Bend SMT Tact Switch, SPST-NO, 16VDC, 50mA, 260g", Manufacturer="Wurth Elektronik", Operating Temperature Max=85°C, Operating Temperature Min=-40°C, Rated Current=50mA, Rated Voltage=16VDC, Category="Tact Switches", Circuit=SPST-NO, ComponentLink1Description="Website Link", ComponentLink1URL=https://www.we-online.com/redexpert/article/434123025826?ad, ComponentLink2Description="Datasheet Link", ComponentLink2URL=https://www.we-online.com/redexpert/spec/434123025826?ad, Contact Material="Stainless Steel", Contact Plating=Silver, Height=2.5mm, Length=4.2mm, Manufacturer Part Number=434123025826, Match Code=WS-TASV, Mount="Surface Mount", Operation Force=260g, Packaging="Tape and Reel", Terminal Material="Copper Alloy", Terminal Plating=Silver, Washable=No, Width=3.2mm
TP1 TP2: library part TESTPOINT, Made By="Robert Pafford"
U1: "Diode Array 1 Pair Common Cathode 45 V Surface Mount TO-263-3, D²Pak (2 Leads + Tab), TO-263AB", Mfr_Name=Vishay, ComponentLink1Description="Supplier Link", ComponentLink1URL=https://www.digikey.com/en/products/detail/smc-diode-solutions/MBRB2545CT/6022901, Copyright="Copyright (C) 2023 Ultra Librarian. All rights reserved.", Manufacturer_Part_Number=MBRB2545CT, RefDes=RefDes, Type=DEV
U1C: "CANbus Controller CAN 2.0 SPI Interface 14-SOIC", Made By="Robert Pafford", Max FD Rate="8 Mbps"
U1R: "Raspberry Pi RP2040", Crystal Frequency="12 MHz", Input Voltage=3.3V, Available Busses="SPI, I2C, PWM, USB", ComponentLink1Description=DigiKey, ComponentLink2Description=Datasheet, ComponentLink2URL=https://datasheets.raspberrypi.org/rp2040/rp2040-datasheet.pdf, Made By="Robert Pafford", Number of GPIOs=29
U2: "16 Bit Analog to Digital Converter 4 Input 1 Sigma-Delta 14-SOIC", Package="SOIC-14 Microchip", Supplier Part Number 1=MCP3428-E/SL-ND, Availability=Unavailable, MF=Microchip, MP=MCP3428-E/SL, Price=None, SnapEDA_Link=https://www.snapeda.com/parts/MCP3428-E/SL/Microchip/view-part/13249/?ref=snap, Supplier 1=Digikey
U2C: library part TJA1442AT, "CAN Interface IC High-Speed CAN Transceiver with Standby Mode", Supplier Part Number 1=771-TJA1442AT/0Z, Made By="Robert Pafford", Max Data Rate=5Mbps, Supplier 1=Mouser
U2R: "IC FLASH 128MBIT SPI/QUAD 8SOIC", Supplier Part Number 1=W25Q128JVSIQ-ND, Made By="Robert Pafford", Size=128M, Supplier 1=Digi-Key
U3: library part SHT41-AD1B-R2, "Digital Relative Humidity Temperature Sensor, Â±1.8 / max 2.5 %RH, Â±0.2 Â°C, Ultra-Low-Power", Package=None, Supplier Part Number 1=1649-SHT41-AD1B-R2CT-ND, Availability="In Stock", Check_prices=https://www.snapeda.com/parts/SHT41-AD1B-R2/Sensirion/view-part/?ref=eda, MF=Sensirion, MP=SHT41-AD1B-R2, Price=None, Purchase-URL=https://pricing.snapeda.com/search/part/SHT41-AD1B-R2/?ref=eda, SnapEDA_Link=https://www.snapeda.com/parts/SHT41-AD1B-R2/Sensirion/view-part/?ref=snap, Supplier 1=Digi-Key
U4 U6: "High-Side or Low-Side Gate Driver IC Non-Inverting 8-SOIC", Mfr_Name=Microchip, Supplier Part Number 1=TC4432EOA713CT-ND, Copyright="Copyright (C) 2024 Ultra Librarian. All rights reserved.", Manufacturer_Part_Number=TC4432EOA713, RefDes=RefDes, Supplier 1=Digikey, Type=DEV
U5: "IC SWITCH SPST-NOX1 25OHM 6TSOP", Mfr_Name=Vishay, Supplier Part Number 1=781-DG448DV-E3, Copyright="Copyright (C) 2024 Ultra Librarian. All rights reserved.", Manufacturer_Part_Number=DG448DV-T1-E3, RefDes=RefDes, Supplier 1=Mouser, Type=DEV
U7: "800-mA 15-V linear voltage regulator 4-SOT-223 -40 to 125", Package="SOT-223-4 Texas Instruments", Arrow_Electronics-Purchase-URL=https://snapeda.com/shop?store=Arrow+Electronics&id=410186, Availability=Good, DigiKey-Purchase-URL=https://snapeda.com/shop?store=DigiKey&id=410186, MF="Texas Instruments", Mouser-Purchase-URL=https://snapeda.com/shop?store=Mouser&id=410186, MP=LM1117IMPX-3.3/NOPB, Price=None, SnapEDA_Link=https://www.snapeda.com/parts/LM1117IMPX-3.3/NOPB/Texas%20Instruments/view-part/410186/?ref=snap, Texas_Instruments-Purchase-URL=https://snapeda.com/shop?store=Texas+Instruments&id=410186
Y1R: library part CRYSTAL_12MHz_SMD_SMALL, "12 MHz ±20ppm Crystal 18pF 100 Ohms 4-SMD, No Lead (3.2x2.5mm)", Frequency="12 MHz", Load Capacitance=18pF, Supplier Part Number 1=2151-RH100-12.000-18-2030-EXT-TRCT-ND, ESR="100 Ohms", Made By="Robert Pafford", Supplier 1=Digi-Key

## Free pads (board coordinates)
  round 177 hole 177 unplated mask-99999: 2(300,300) 2(750,4200) 2(1600,4200) 2(3850,4200) 2(6200,300) 2(6200,2300)

## Via types
v1: diameter 22, hole 10, Top Layer to Bottom Layer, tented both sides, 56 vias
v2: diameter 27.56, hole 11.81, Top Layer to Bottom Layer, tented both sides, 40 vias
v3: diameter 27, hole 13, Top Layer to Bottom Layer, tented both sides, 11 vias
v4: diameter 31.5, hole 15.75, Top Layer to Bottom Layer, tented both sides, 10 vias
v5: diameter 45.28, hole 27.56, Top Layer to Bottom Layer, tented both sides, 5 vias
v6: diameter 30, hole 15, Top Layer to Bottom Layer, tented both sides, 3 vias
v7: diameter 25, hole 12, Top Layer to Bottom Layer, tented both sides, 2 vias
v8: diameter 40, hole 20, Top Layer to Bottom Layer, tented both sides, 2 vias
v9: diameter 50, hole 20, Top Layer to Bottom Layer, tented both sides, 1 vias

## Nets (pads, with @x,y where several pads share a name; then routed paths per layer and width w, separated by ;. In a path a pad name is that pad's centre, name@x,y a point inside that pad or via, vN(x,y) a via of type N, cw(c..) or ccw(c..) an arc to the next point about the centre after c; other vN are vias at no path point)
1v1_RP2040: C11R.1 C12R.1 C13R.1 U1R.23 U1R.45 U1R.50 | length 566.9
  Top Layer w7.87: U1R.50@4171.59,457.06 v2(4220.31,457.06) v2(4220.31,535.8) U1R.45@4171.59,535.8 ; v2@4393.54,496.43 4398.86,496.43 4406.74,488.56 U1R.23@4442.26,488.56
  Bottom Layer w15.75: C11R.1@4174.44,535.8 v2(4220.31,535.8) ; C13R.1@4220.31,411.2 v2(4220.31,457.06) 4358.21,457.06 v2(4393.54,492.39) 4435.36,492.39 4439.4,496.43 4440.19,496.43 4447.28,503.52 C12R.1@4447.28,504.31